# Altium PCB beta2.0.PcbDoc
Units mil, origin at the board's own origin, x right, y up, seen from the top; angles counter-clockwise.
Board outline 3150 x 3940 mil, 2 copper layers (Top Layer, Bottom Layer); 210 components, 112 nets, 560 pads, 14 vias.
Unrouted connection lines stored in the file: 395.
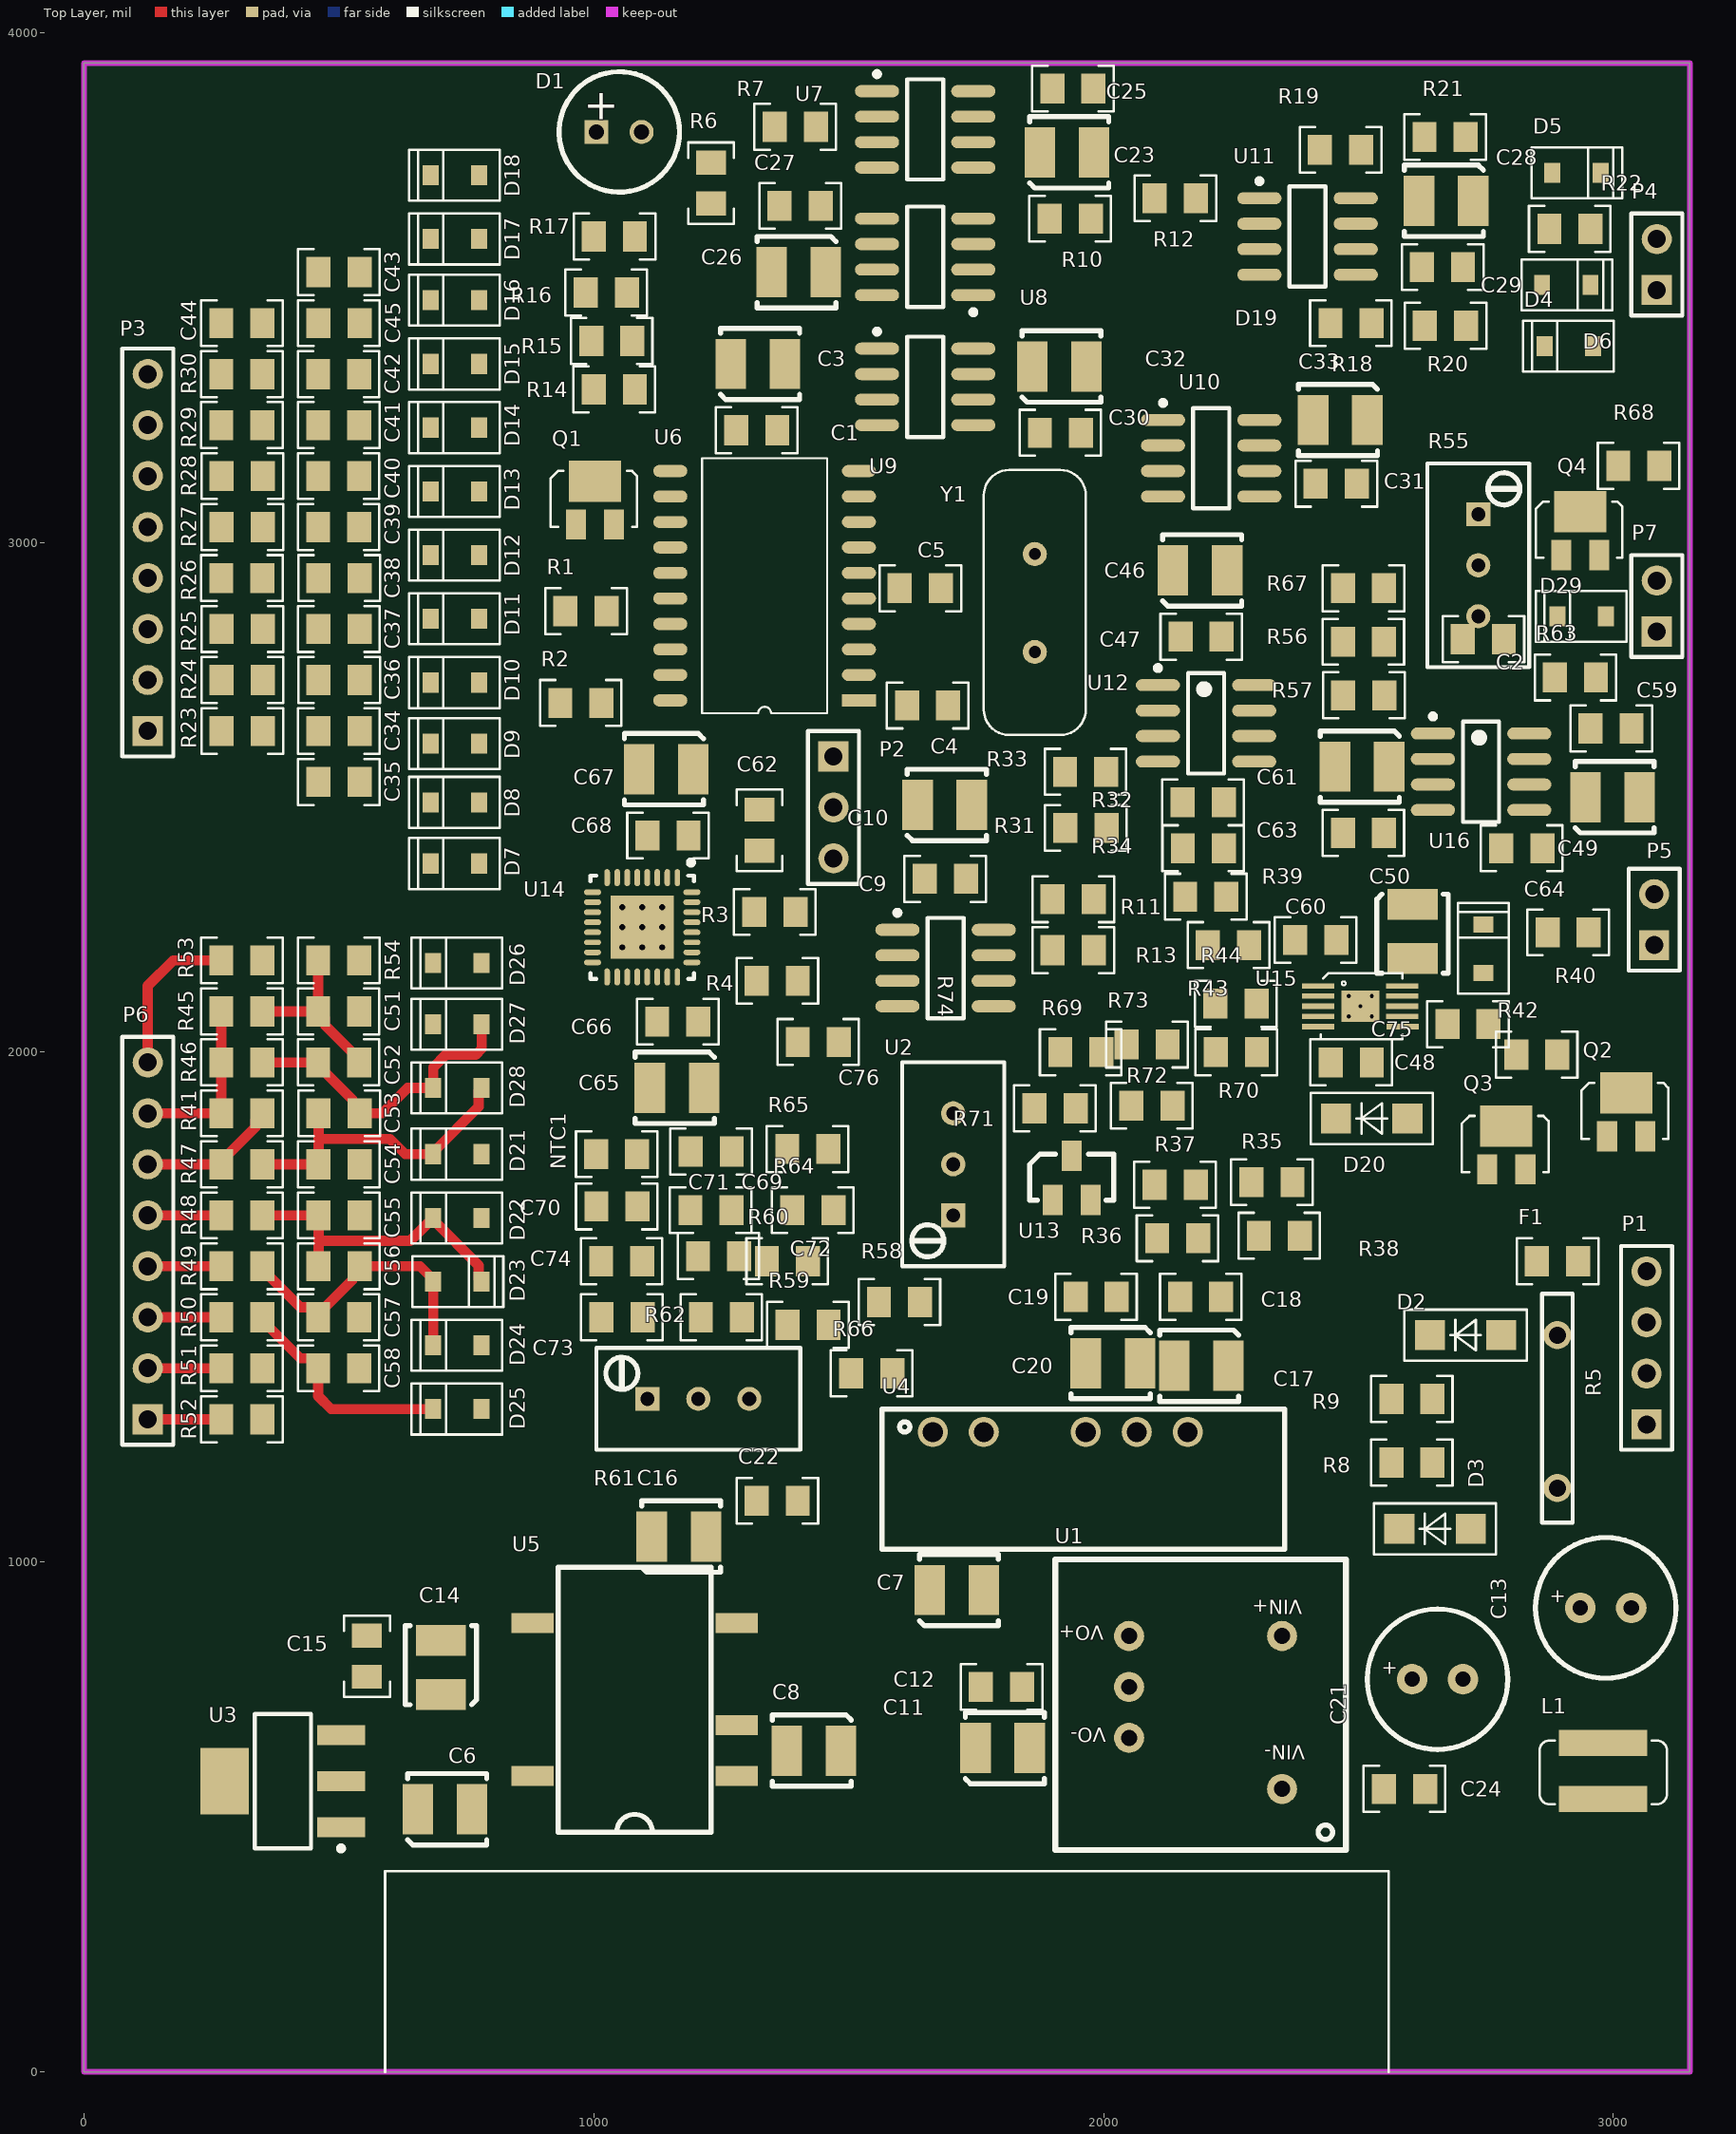
[diagram p0: Top Layer view]
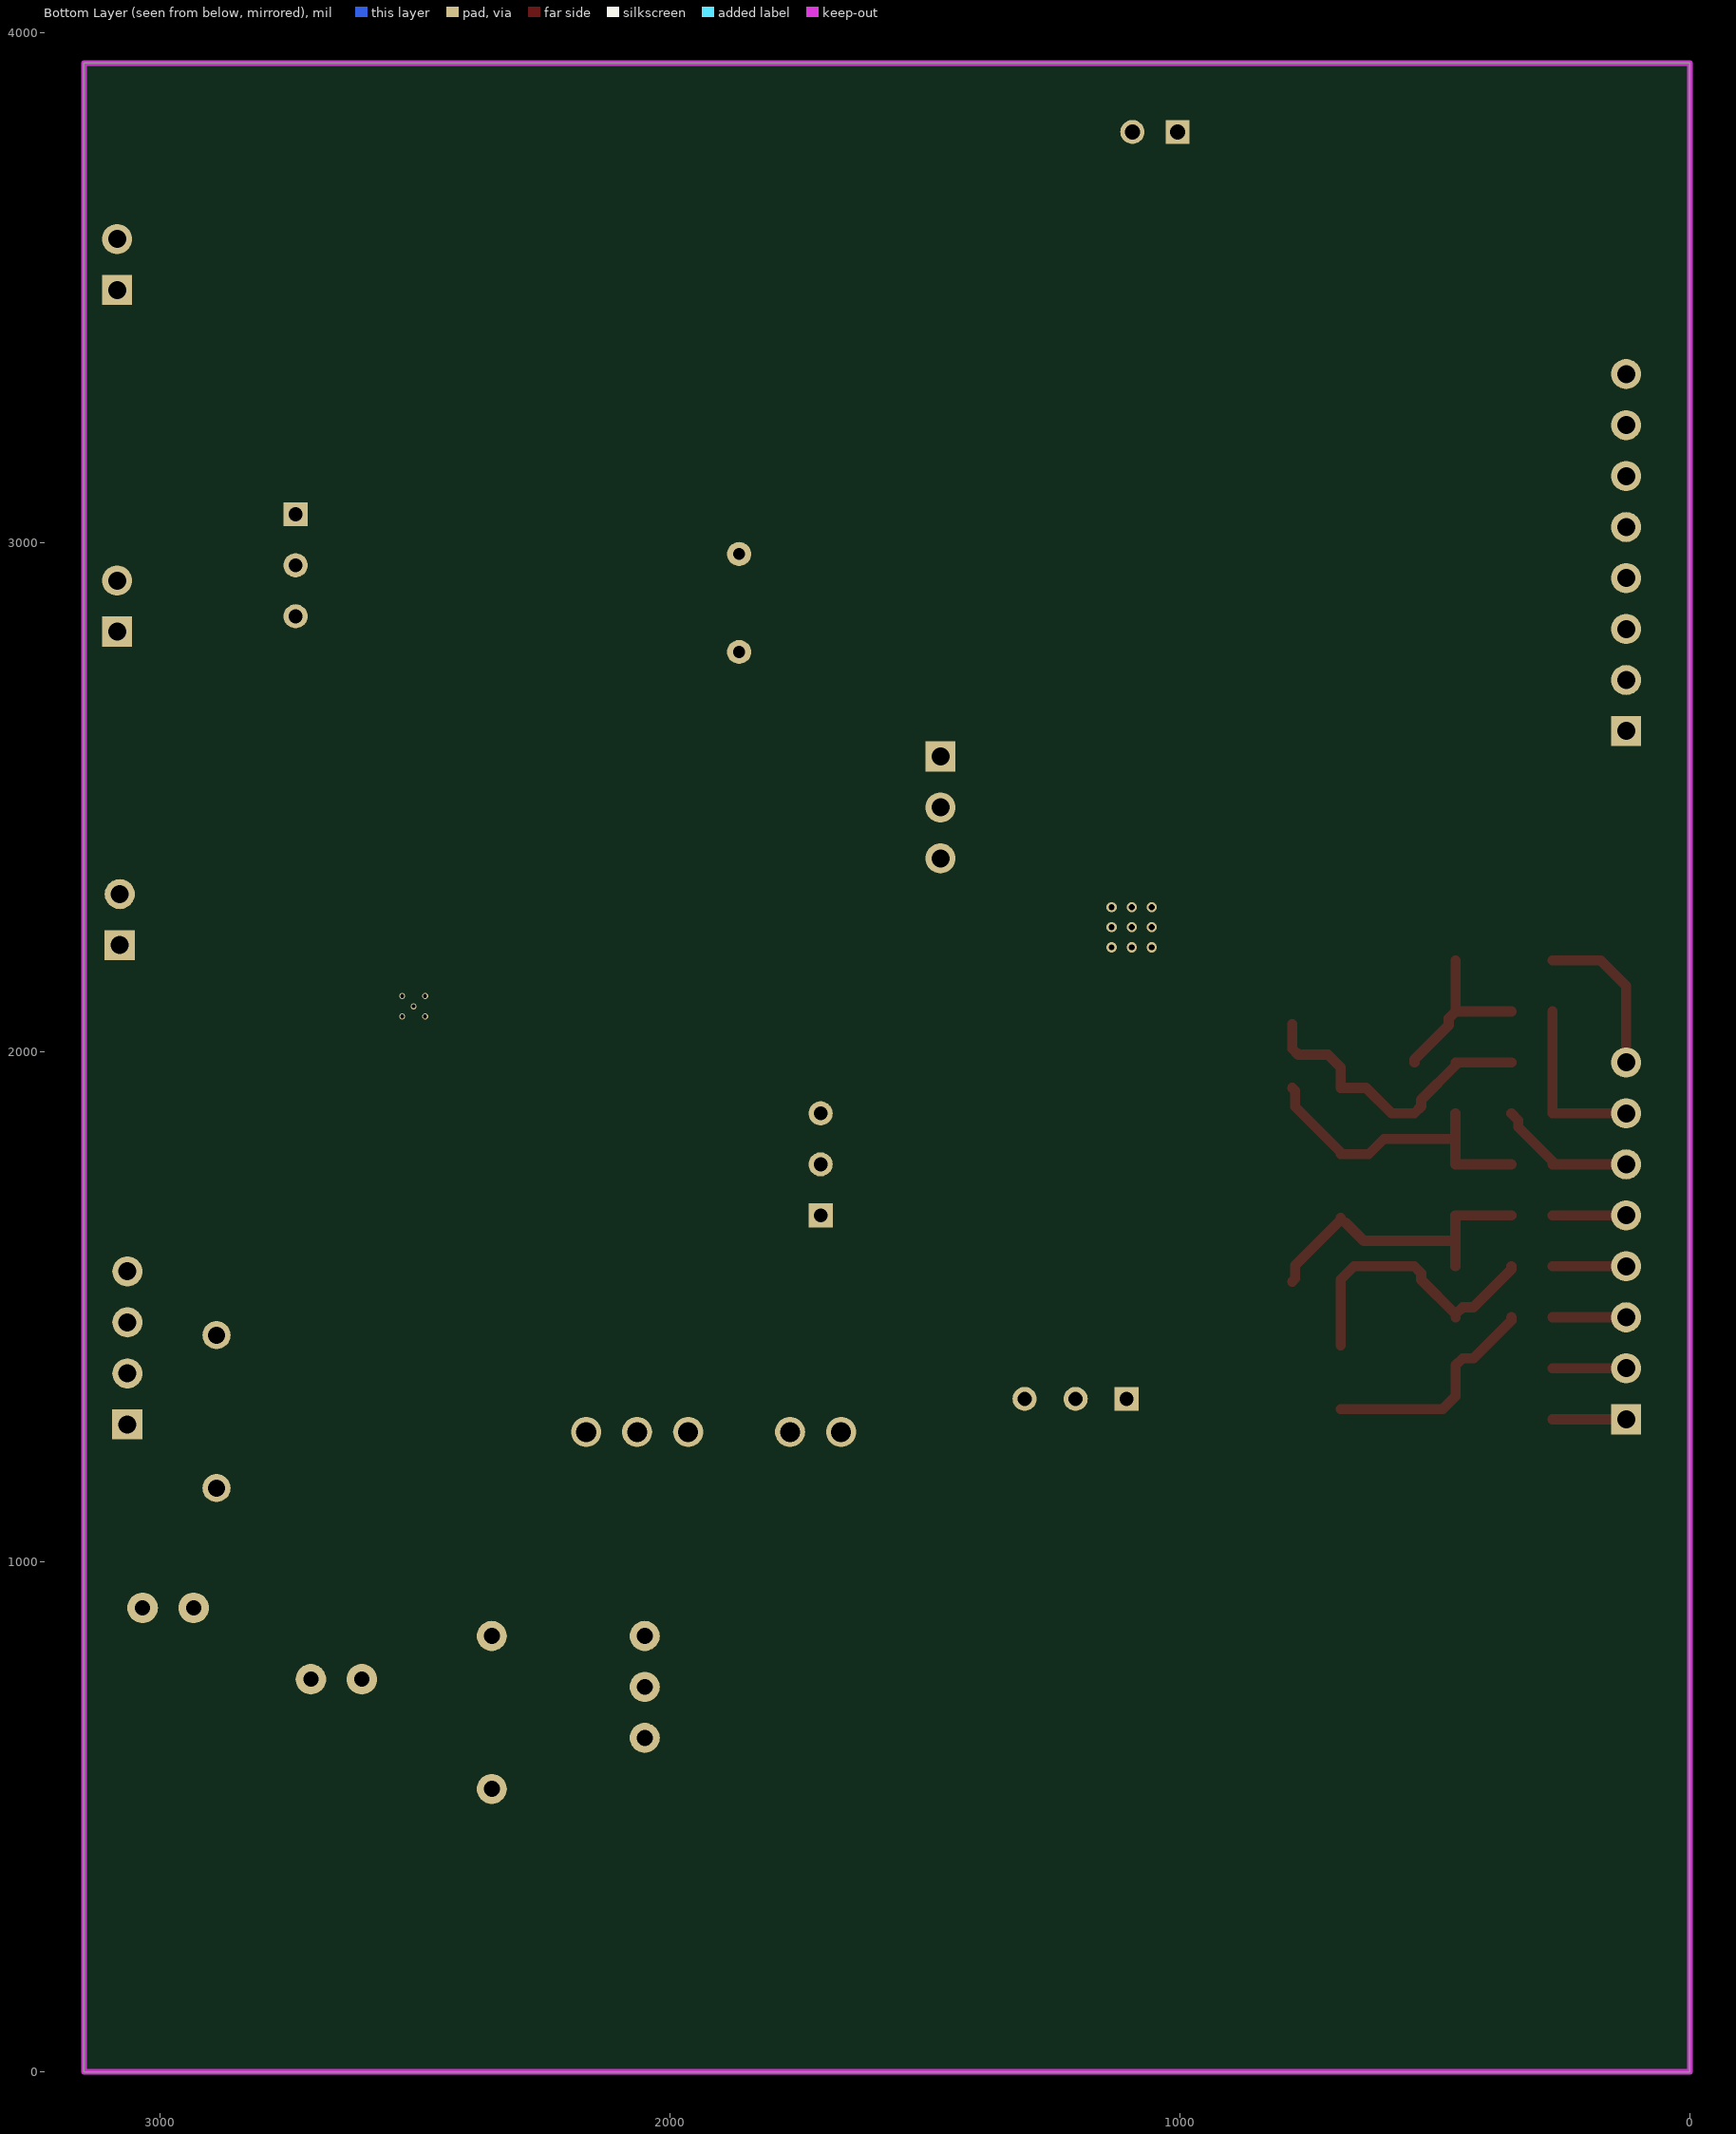
[diagram p1: Bottom Layer view, seen from below]

## Layer stack, top to bottom
Top Solder: solder mask 0.4, Solder Resist, Dk 3.5
Top Layer: signal copper 1.4
Dielectric 1: dielectric 12.6, FR-4, Dk 4.8
Bottom Layer: signal copper 1.4
Bottom Solder: solder mask 0.4, Solder Resist, Dk 3.5

## Board outline
0,0 0,3940 3150,3940 3150,0

## Design rules (kind name [scope] priority, off if disabled: settings)
Clearance [All] p1: gap=10 ignorepadtopadclearanceinfootprint=FALSE except(0: Arc-Hole Track-Hole SMDPad-Hole THPad-Hole Via-Hole Fill-Hole Poly-Hole Region-Hole Text-Hole)
PolygonConnect [All] p1: connectstyle=Relief reliefconductorwidth=10 reliefentries=4 polygonreliefangle="90 Angle" airgapwidth=10
RoutingVias [All] p1: holewidth=28 width=50 viastyle="Through Hole" minholewidth=28 minwidth=50 maxholewidth=28 maxwidth=50
SolderMaskExpansion [All] p1: expansion=4 istentingtop=FALSE
Width [All] p1: maxlimit=40 minlimit=8 preferedwidth=20 minimp=50.000000 maximp=50.000000 favimp=50.000000
30 further rules are at their usual default settings.

## Components (designator, comment, footprint, x,y, rotation, side; value= is the part's Value field where it differs from the comment)
C1 "CC0805MRX7R9BB104" 0805C 1279.37,3220 r0 top value=0.1uF
C2 "CC0805MRX7R9BB330" 0805C 2785,2810 r180 top value=33pF
C3 "T494B106M006AHAUTO" CB 1268.7,3350 r90 top value=10uF
C4 "CC0805MRX7R9BB106" 0805C 1695,2680 r180 top value=10uF
C5 "CC0805MRX7R9BB330" 0805C 1680.63,2910 r180 top value=33pF
C6 "T494B106M006AHAUTO" CB 655,515 r90 top value=10uF
C7 "T494B106M006AHAUTO" CB 1658.7,945 r90 top value=10uF
C8 "T494B106M006AHAUTO" CB 1485,630 r270 top value=10uF
C9 "CC0805MRX7R9BB104" 0805C 1649.37,2340 r0 top value=0.1uF
C10 "T494B106M006AHAUTO" CB 1635,2485 r90 top value=10uF
C11 "T494B107M006AHAUTO" CB 1748.7,635 r90 top value=100uF
C12 "CC0805MRX7R9BB104" 0805C 1840,755 r180 top value=0.1uF
C13 "ECR1HQG100M-063007" Φ6.3×11.5 2935,910 r0 top value=10uF
C14 "T494B476M010AHAUTO" CB 700,740 r180 top value=47uF
C15 "CC0805MRX7R9BB104" 0805C 555,775 r90 top value=0.1uF
C16 "T494B106M006AHAUTO" CB 1113.7,1050 r90 top value=10uF
C17 "T494B476K025ATAUTO" CB 2245,1385 r270 top value=47uF
C18 "CC0805MRX7R9BB104" 0805C 2230.63,1520 r180 top value=0.1uF
C19 "CC0805MRX7R9BB104" 0805C 1945,1520 r0 top value=0.1uF
C20 "T494B476K025ATAUTO" CB 2071.3,1390 r270 top value=47uF
C21 "ECR1HQG100M-063007" Φ6.3×11.5 2605,770 r0 top value=10uF
C22 "CC0805MRX7R9BB104" 0805C 1400,1120 r180 top value=0.1uF
C23 "T494B106M006AHAUTO" CB 1875,3765 r90 top value=10uF
C24 "CC0805MRX7R9BB104" 0805C 2550,555 r0 top value=0.1uF
C25 "CC0805MRX7R9BB104" 0805C 1980,3890 r180 top value=0.1uF
C26 "T494B106M006AHAUTO" CB 1455,3530 r270 top value=10uF
C27 "CC0805MRX7R9BB104" 0805C 1445,3660 r180 top value=0.1uF
C28 "T494B106M006AHAUTO" CB 2725,3670 r270 top value=10uF
C29 "CC0805MRX7R9BB104" 0805C 2705,3540 r180 top value=0.1uF
C30 "CC0805MRX7R9BB104" 0805C 1875,3215 r0 top value=0.1uF
C31 "CC0805MRX7R9BB104" 0805C 2496.57,3115 r180 top value=0.1uF
C32 "T494B106M006AHAUTO" CB 1860,3345 r90 top value=10uF
C33 "T494B106M006AHAUTO" CB 2517.24,3240 r270 top value=10uF
C34 "CC0805MRX7R9BB103" 0805C 460,2630 r0 top value=0.01uF
C35 "CC0805MRX7R9BB104" 0805C 460,2530 r0 top value=0.1uF
C36 "CC0805MRX7R9BB103" 0805C 540.63,2730 r180 top value=0.01uF
C37 "CC0805MRX7R9BB103" 0805C 460,2830 r0 top value=0.01uF
C38 "CC0805MRX7R9BB104" 0805C 540.63,2930 r180 top value=0.1uF
C39 "CC0805MRX7R9BB103" 0805C 459.37,3030 r0 top value=0.01uF
C40 "CC0805MRX7R9BB103" 0805C 459.37,3130 r0 top value=0.01uF
C41 "CC0805MRX7R9BB104" 0805C 540,3230 r180 top value=0.1uF
C42 "CC0805MRX7R9BB103" 0805C 459.37,3330 r0 top value=0.01uF
C43 "CC0805MRX7R9BB103" 0805C 460,3530 r0 top value=0.01uF
C44 "CC0805MRX7R9BB104" 0805C 350,3430 r180 top value=0.1uF
C45 "CC0805MRX7R9BB103" 0805C 460,3430 r0 top value=0.01uF
C46 "T494B106M006AHAUTO" CB 2135.94,2945 r90 top value=10uF
C47 "CC0805MRX7R9BB104" 0805C 2231.57,2815 r180 top value=0.1uF
C48 "CC0805MRX7R9BB103" 0805C 2445.32,1980 r0 top value=0.01uF
C49 "T494B106M025AHAUTO" CB 2945,2500 r90 top value=10uF
C50 "T494B106M025AHAUTO" CB 2605.94,2290 r0 top value=10uF
C51 "CC0805MRX7R9BB103" 0805C 459.37,2080 r0 top value=0.01uF
C52 "CC0805MRX7R9BB104" 0805C 459.37,1980 r0 top value=0.1uF
C53 "CC0805MRX7R9BB104" 0805C 540.63,1880 r180 top value=0.1uF
C54 "CC0805MRX7R9BB103" 0805C 460,1780 r0 top value=0.01uF
C55 "CC0805MRX7R9BB103" 0805C 460,1680 r0 top value=0.01uF
C56 "CC0805MRX7R9BB104" 0805C 460,1580 r0 top value=0.1uF
C57 "CC0805MRX7R9BB103" 0805C 459.37,1480 r0 top value=0.01uF
C58 "CC0805MRX7R9BB103" 0805C 459.37,1380 r0 top value=0.01uF
C59 "CC0805MRX7R9BB104" 0805C 3035.63,2635 r180 top value=0.1uF
C60 "CC0805MRX7R9BB104" 0805C 2375.94,2220 r0 top value=0.1uF
C61 "T494B106M025AHAUTO" CB 2560,2560 r270 top value=10uF
C62 "CC0805MRX7R9BB104" 0805C 1325,2395 r90 top value=0.1uF
C63 "CC0805MRX7R9BB104" 0805C 2469.37,2430 r0 top value=0.1uF
C64 "CC0805MRX7R9BB104" 0805C 2780,2400 r0 top value=0.1uF
C65 "T494B106M006AHAUTO" CB 1216.3,1930 r270 top value=10uF
C66 "CC0805MRX7R9BB104" 0805C 1205,2060 r180 top value=0.1uF
C67 "T494B106M006AHAUTO" CB 1195,2555 r270 top value=10uF
C68 "CC0805MRX7R9BB104" 0805C 1185.63,2425 r180 top value=0.1uF
C69 "CC0805MRX7R9BB103" 0805C 1189.37,1690 r0 top value=0.01uF
C70 "CC0805MRX7R9BB104" 0805C 1005,1697.36 r0 top value=0.1uF
C71 "CC0805MRX7R9BB103" 0805C 1190,1805 r0 top value=0.01uF
C72 "CC0805MRX7R9BB103" 0805C 1204.37,1600 r0 top value=0.01uF
C73 "CC0805MRX7R9BB104" 0805C 1015,1480 r0 top value=0.1uF
C74 "CC0805MRX7R9BB103" 0805C 1014.37,1590 r0 top value=0.01uF
C75 "CC0805MRX7R9BB104" 0805C 2674.37,2055 r0 top value=0.1uF
C76 "CC0805MRX7R9BB104" 0805C 1400,2020 r0 top value=0.1uF
D1 "150080GS75000" LEDΦ3.0 1005,3805 r0 top
D2 "1N5819HW" SOD123 2780,1445 r180 top
D3 "1N5819HW" SOD123 2720,1065 r180 top
D4 "SD12CT1" SOD323 2960,3385 r180 top
D5 "SD12CT1" SOD323 2880,3725 r0 top
D6 "SD12CT1" SOD323 2860,3505 r0 top
D7 "SD03C" SOD323 775,2370 r180 top
D8 "SD03C" SOD323 775,2490 r180 top
D9 "SD03C" SOD323 775,2605 r180 top
D10 "SD03C" SOD323 775,2725 r180 top
D11 "SD03C" SOD323 775,2850 r180 top
D12 "SD03C" SOD323 775,2975 r180 top
D13 "SD03C" SOD323 775,3100 r180 top
D14 "SD03C" SOD323 775,3225 r180 top
D15 "SD03C" SOD323 775,3350 r180 top
D16 "SD03C" SOD323 775,3475 r180 top
D17 "SD03C" SOD323 775,3595 r180 top
D18 "SD03C" SOD323 775,3720 r180 top
D19 "SD15CT1" SOD323 2745,2155 r90 top
D20 "RB160MM-50TF" SOD123 2595.94,1870 r180 top
D21 "SD03C" SOD323 780,1800 r180 top
D22 "SD03C" SOD323 780,1675 r180 top
D23 "SD03C" SOD323 685,1550 r0 top
D24 "SD03C" SOD323 780,1425 r180 top
D25 "SD03C" SOD323 780,1300 r180 top
D26 "SD03C" SOD323 780,2175 r180 top
D27 "SD03C" SOD323 780,2055 r180 top
D28 "SD03C" SOD323 780,1930 r180 top
D29 "SD15CT1" SOD323 2985,2855 r180 top
F1 "Fuse 1" 0805R 2930.63,1590 r180 top
L1 "VLS4012HBX-150M" VLS4012 2980,645 r0 top value=15uH
NTC1 "NTCS0805E3103JHT" 0805R 1085,1800 r180 top
P1 "Header 4" HDR1X4 3065,1270 r90 top
P2 "Header 3" HDR1X3 1470,2580 r270 top
P3 "Header 8" HDR1X8 125,2630 r90 top
P4 "Header 2" HDR1X2 3085,3495 r90 top
P5 "Header 2" HDR1X2 3080,2210 r90 top
P6 "Header 8" HDR1X8 125,1280 r90 top
P7 "Header 2" HDR1X2 3085,2825 r90 top
Q1 "MMSS8050" SOT-23-BJT 965,3035 r0 top
Q2 "SS8550" SOT-23-BJT 2987.6,1835 r0 top
Q3 "SI2309" SOT-23-MOS 2752.6,1770 r0 top
Q4 "MMSS8050" SOT-23-BJT 2897.6,2975 r0 top
R1 "RC0805JR-07120RL" 0805R 1025,2865 r180 top value=120
R2 "RC0805JR-0710KL" 0805R 934.37,2685 r0 top value=10K
R3 "RC0805JR-07470RL" 0805R 1315,2275 r0 top value=470
R4 "RC0805JR-073300RL" 0805R 1400,2140 r180 top value=3.3K
R5 "10D470K" mov 2890,1295 r90 top
R6 "RC0805JR-0710KRL" 0805R 1230,3664.37 r90 top value=10K
R7 "RC0805JR-07470RL" 0805R 1355,3815 r0 top value=470
R8 "PNP-200KJBJ26-10R" 0805R 2564.37,1195 r0 top value=10
R9 "PNP-200KJBJ26-10R" 0805R 2564.37,1320 r0 top value=10
R10 "RC0805JR-0710KRL" 0805R 1894.37,3635 r0 top value=10K
R11 "RC0805JR-071KL" 0805R 1980.63,2300 r180 top value=1K
R12 "RC0805JR-07470RL" 0805R 2180.63,3675 r180 top value=470
R13 "RC0805JR-071KL" 0805R 1980.63,2200 r180 top value=1K
R14 "RC0805JR-07470RL" 0805R 1000,3300 r0 top value=470
R15 "RC0805JR-07470RL" 0805R 995,3395 r0 top value=470
R16 "RC0805JR-07470RL" 0805R 984.37,3490 r0 top value=470
R17 "RC0805JR-07470RL" 0805R 1080.63,3600 r180 top value=470
R18 "RC0805JR-0720RL" 0805R 2445,3430 r0 top value=20
R19 "RC0805JR-0720RL" 0805R 2505,3770 r180 top value=20
R20 "RC0805JR-0710KL" 0805R 2710.63,3425 r180 top value=10K
R21 "RC0805JR-0710KL" 0805R 2710,3795 r180 top value=10K
R22 "RC0805JR-07120RL" 0805R 2874.37,3615 r0 top value=120
R23 "RC0805JR-071KL" 0805R 350.63,2630 r180 top value=1K
R24 "RC0805JR-071KL" 0805R 350.63,2730 r180 top value=1K
R25 "RC0805JR-071KL" 0805R 350.63,2830 r180 top value=1K
R26 "RC0805JR-071KL" 0805R 350,2930 r180 top value=1K
R27 "RC0805JR-071KL" 0805R 350.63,3030 r180 top value=1K
R28 "RC0805JR-071KL" 0805R 350.63,3130 r180 top value=1K
R29 "RC0805JR-071KL" 0805R 350,3230 r180 top value=1K
R30 "RC0805JR-071KL" 0805R 350,3330 r180 top value=1K
R31 "RC0805JR-071KL" 0805R 1925,2440 r0 top value=1K
R32 "RC0805JR-071KL" 0805R 2155,2490 r0 top value=1K
R33 "RC0805JR-071KL" 0805R 1924.37,2550 r0 top value=1K
R34 "RC0805JR-071KL" 0805R 2155.32,2400 r0 top value=1K
R35 "RC0805JR-073KL" 0805R 2290,1745 r0 top value=3K
R36 "RC0805JR-0710KL" 0805R 2105,1635 r0 top value=10K
R37 "RC0805JR-073KL" 0805R 2100,1740 r0 top value=3K
R38 "RC0805JR-0710KL" 0805R 2304.37,1640 r0 top value=10K
R39 "RC0805JR-000KL" 0805R 2240.63,2305 r180 top value=0R
R40 "RC0805JR-0715RL" 0805R 2870.94,2235 r0 top value=15
R41 "RC0805JR-075600RL" 0805R 350,1880 r180 top value=5.6K
R42 "RC0805JR-0715RL" 0805R 2809.37,1995 r0 top value=15
R43 "RC0805JR-075600RL" 0805R 2219.37,2095 r0 top value=5.6K
R44 "RC0805JR-078200RL" 0805R 2285,2210 r180 top value=8.2K
R45 "RC0805JR-071KL" 0805R 350,2080 r180 top value=1K
R46 "RC0805JR-071KL" 0805R 350,1980 r180 top value=1K
R47 "RC0805JR-071KL" 0805R 350,1780 r180 top value=1K
R48 "RC0805JR-071KL" 0805R 350,1680 r180 top value=1K
R49 "RC0805JR-071KL" 0805R 350,1580 r180 top value=1K
R50 "RC0805JR-071KL" 0805R 350,1480 r180 top value=1K
R51 "RC0805JR-07470RL" 0805R 350,1380 r180 top value=470
R52 "RC0805JR-07470RL" 0805R 350,1280 r180 top value=470
R53 "RC0805JR-07470RL" 0805R 350,2180 r180 top value=470
R54 "RC0805JR-07100RL" 0805R 540,2180 r180 top value=100R
R55 "3296W-1-104" POTENTIOMETER-3296W 2735,2955 r270 top value=100K
R56 "RC0805JR-07100ML" 0805R 2469.37,2805 r0 top value=100M
R57 "RC0805JR-072KL" 0805R 2550.63,2700 r180 top value=2K
R58 "RC0805JR-075600RL" 0805R 1559.37,1510 r0 top value=5.6K
R59 "RC0805JR-071000KL" 0805R 1380,1465 r0 top value=1M
R60 "RC0805JR-0768KL" 0805R 1339.37,1590 r0 top value=68K
R61 "3296W-1-102" POTENTIOMETER-3296W 1205,1320 r0 top value=1K
R62 "RC0805JR-0768KL" 0805R 1210,1480 r0 top value=68K
R63 "RC0805JR-072KL" 0805R 2965.63,2735 r180 top value=2K
R64 "RC0805JR-071KL" 0805R 1389.37,1690 r0 top value=1K
R65 "RC0805JR-071KL" 0805R 1379.37,1810 r0 top value=1K
R66 "RC0805JR-071KL" 0805R 1505,1370 r0 top value=1K
R67 "RC0805JR-0710KL" 0805R 2550,2910 r180 top value=10K
R68 "RC0805JR-07470RL" 0805R 3009.37,3150 r0 top value=470
R69 "RC0805JR-072KL" 0805R 1915,2000 r0 top value=2K
R70 "RC0805JR-072KL" 0805R 2220,2000 r0 top value=2K
R71 "RC0805JR-073300RL" 0805R 1864.37,1890 r0 top value=3.3K
R72 "RC0805JR-074700RL" 0805R 2054.37,1895 r0 top value=4.7K
R73 "RC0805JR-07100ML" 0805R 2045,2015 r0 top value=100M
R74 "3296W-1-104" POTENTIOMETER-3296W 1705,1780 r90 top value=100K
U1 "WRB_ST(SD)-3WR2" WRB_ST(SD)-3WR2 2350,555 r180 top
U2 "VO2630" SO8_N 1690,2165 r0 top
U3 "LM1117IMP-3.3/NOPB" SOT223_N 390,570 r180 top
U4 "A05_S-1WR3" A05_S-1WR3 1665,1255 r0 top
U5 "F0505XT-W2R3" F0505XT-W2R3 1280,580 r90 top
U6 "STC12C5620AD" SOP20 1520.08,2690 r180 top
U7 "6N137" SO8_N 1650,3810 r0 top
U8 "6N137" SO8_N 1650,3560 r180 top
U9 "VO2630" SO8_N 1650,3305 r0 top
U10 "VO2630" SO8_N 2210.94,3165 r0 top
U11 "SN65LBC184" SO8_N 2400,3600 r0 top
U12 "DAC7611U" TI-D8_N 2200.94,2645 r0 top
U13 "TL431" SOT-23-3 1900,1710 r0 top
U14 "AD7124-8" TI-RHB32-3150X3150TP_V 1095,2245 r270 top
U15 "XTR111" S-PDSO-G10 2420.94,2130 r0 top
U16 "TL062ACD" TI-D8_N 2740.43,2550 r0 top
Y1 "XTAL" 11.0592MHZ 1865,2977.13 r270 top

## Footprints (in the part's own frame and the unit in brackets; to place one, negate y for a bottom-side part, rotate by r counter-clockwise, add the part's x,y. Pads: shape width x height; smd on the part's side, far side on the other; paste and mask are expansions set on the pad)
11.0592MHZ [mm]
  round 1.2 hole 0.6: 1(0,0) 2(4.88,0)
  silkscreen extent -4.19,-2.54 9.02,2.54, body extent -3.99,-2.29 8.81,2.54, height 4.3
0805C [mm]
  rect 1.2x1.5 smd: 1(0,0) 2(2.048,0)
  silkscreen extent -1.02,-1.14 3.05,1.14, body extent 0.02,-0.65 2.02,0.66, height 0.73
0805R [mm]
  rect 1.2x1.5 smd: 1(0,0) 2(2.048,0)
  silkscreen extent -1.02,-1.14 3.05,1.14, body extent -0.13,-0.67 2.17,0.68, height 0.76
A05_S-1WR3 [mm]
  round 1.5 hole 1: 1(0,0) 2(2.54,0) 4(7.62,0) 5(10.16,0) 6(12.7,0)
  silkscreen extent -2.54,-5.84 17.53,1.14, body extent -2.33,-5.29 17.32,0.71, height 10.16
CB [mm] "Tantalum?Capacitor"
  rect 2.5x1.524 smd: 1(0,0) 2(0,-2.7)
  silkscreen extent -1.78,-3.43 1.78,0.51, body extent -1.48,-3.37 1.52,0.33, height 4.11
F0505XT-W2R3 [mm]
  rect 1x2.1 smd: 1(0,0) 2(2.54,0) 4(7.62,0) 5(7.62,10.16) 8(0,10.16)
  silkscreen extent -2.79,1.27 10.41,8.89, body extent -2.79,-0.61 10.41,10.79, height 5
HDR1X2 [mm] "Connector; Header; 2 Position"
  rect 1.5x1.5 hole 0.9: 1(0,0)
  round 1.5 hole 0.9: 2(2.54,0)
  silkscreen extent -1.27,-1.27 3.81,1.27
HDR1X3 [mm] "Connector; Header; 3 Position"
  rect 1.5x1.5 hole 0.9: 1(0,0)
  round 1.5 hole 0.9: 2(2.54,0) 3(5.08,0)
  silkscreen extent -1.27,-1.27 6.35,1.27
HDR1X4 [mm] "Connector; Header; 4 Position"
  rect 1.5x1.5 hole 0.9: 1(0,0)
  round 1.5 hole 0.9: 2(2.54,0) 3(5.08,0) 4(7.62,0)
  silkscreen extent -1.27,-1.27 8.89,1.27
HDR1X8 [mm] "Connector; Header; 8 Position"
  rect 1.5x1.5 hole 0.9: 1(0,0)
  round 1.5 hole 0.9: 2(2.54,0) 3(5.08,0) 4(7.62,0) 5(10.16,0) 6(12.7,0) 7(15.24,0) 8(17.78,0)
  silkscreen extent -1.27,-1.27 19.05,1.27
LEDΦ3.0 [mm]
  rect 1.2x1.2 hole 0.762: 1(0,0)
  round 1.2 hole 0.762: 2(2.25,0)
  silkscreen extent -1.85,-3 4.14,3, body extent -0.64,-1.9 2.79,1.9, height 4.64
mov [mm] "Axial Device, Thru-Hole; 2 Leads; 0.3 in Pin Spacing"
  round 1.4 hole 0.85: 1(-3.81,0) 2(3.81,0)
  silkscreen extent -5.53,-0.76 5.88,0.76, body extent -5.5,-0.9 5.8,0.95, height 18.5
POTENTIOMETER-3296W [mm] "Thru-Hole; 3 Leads"
  rect 1.2x1.2 hole 0.7: 1(-2.54,0)
  round 1.2 hole 0.7: 2(0,0) 3(2.54,0)
  silkscreen extent -5.08,-2.54 5.08,2.54, body extent -4.78,-2.41 4.78,2.41, height 6.3
S-PDSO-G10 [mm]
  rect 1.6x0.27 smd: 1(0,0) 2(0,-0.508) 3(0,-1.016) 4(0,-1.524) 5(0,-2.032) 6(4.2,-2.032) 7(4.191,-1.524) 8(4.191,-1.016) 9(4.191,-0.508) 10(4.191,0)
  rect 1.88x1.57 smd: 12(2.1,-1.016)
  silkscreen extent 0.13,-2.67 4.19,0.64
SO8_N [mm] "SOIC, 8-Leads, Body 4.9x3.9mm, Pitch 1.27mm, IPC Medium Density"
  oval 2.2x0.6 smd: 1(-2.4,1.905) 2(-2.4,0.635) 3(-2.4,-0.635) 4(-2.4,-1.905) 5(2.4,-1.905) 6(2.4,-0.635) 7(2.4,0.635) 8(2.4,1.905)
  silkscreen extent -2.52,-2.5 0.9,2.88, body extent -2,-2.5 2,2.5, height 1.75
SOD123 [mm]
  rect 1.5x1.5 smd: 1(0,0) 2(3.556,0)
  silkscreen extent -1.27,-1.27 4.83,1.27, body extent -0.2,-0.8 3.5,0.8, height 1.27
SOD323 [mm]
  rect 0.8x1 smd: 1(0,0) 2(2.413,0)
  silkscreen extent -1.03,-1.27 3.49,1.27, body extent -0.16,-0.68 2.44,0.67, height 1.1
SOP20 [mm]
  rect 1.7x0.6 smd: 1(0,0)
  oval 1.7x0.6 smd: 2(0,-1.27) 3(0,-2.54) 4(0,-3.81) 5(0,-5.08) 6(0,-6.35) 7(0,-7.62) 8(0,-8.89) 9(0,-10.16) 10(0,-11.43) 11(9.4,-11.43) 12(9.4,-10.16) 13(9.4,-8.89) 14(9.4,-7.62) 15(9.4,-6.35) 16(9.4,-5.08) 17(9.4,-3.81) 18(9.4,-2.54) 19(9.4,-1.27) 20(9.4,0)
  silkscreen extent 1.58,-12.06 7.82,0.64, body extent -0.45,-12.07 9.85,0.63, height 2.51
SOT223_N [mm] "SOT223, 4-Leads, Body 6.5x3.5mm, Pitch 2.3mm, Lead Span 7mm, IPC Medium Density"
  rect 2.4x1 smd: 1(-2.9,2.3) 2(-2.9,0) 3(-2.9,-2.3)
  rect 2.4x3.3 smd: 4(2.9,0)
  silkscreen extent -3.03,-3.35 1.4,3.47, body extent -1.85,-3.35 1.85,3.35, height 1.7
SOT-23-3 [mm]
  rect 1x1.524 smd: 1(0,0) 2(1.9,0) 3(0.95,2.2)
  silkscreen extent -1.14,0 3.05,2.29, body extent -0.55,-0.23 2.45,2.27, height 0.55
SOT-23-BJT [mm]
  rect 2.6x2.05 smd: 1(0.95,2.159)
  rect 1x1.5 smd: 2(0,0) 3(1.9,0)
  silkscreen extent -1.27,-0.13 3.05,2.67, body extent -0.55,-0.23 2.45,2.27, height 0.55
SOT-23-MOS [mm]
  rect 1x1.5 smd: 1(0,0) 3(1.9,0)
  rect 2.6x2.05 smd: 2(0.95,2.159)
  silkscreen extent -1.27,-0.13 3.05,2.67, body extent -0.55,-0.11 2.45,2.39, height 0.55
TI-D8_N [mm] "SOIC, 8-Leads, Body 4.9x3.9mm, Pitch 1.27mm, IPC Medium Density"
  oval 2.2x0.6 smd: 1(-2.4,1.905) 2(-2.4,0.635) 3(-2.4,-0.635) 4(-2.4,-1.905) 5(2.4,-1.905) 6(2.4,-0.635) 7(2.4,0.635) 8(2.4,1.905)
  silkscreen extent -2.52,-2.5 0.9,2.88, body extent -2,-2.5 2,2.5, height 1.75
TI-RHB32-3150X3150TP_V [mm] "QFN, 32-Leads, Body 5x5mm, Pitch 0.5mm, Thermal Pad 3.15x3.15mm"
  oval 0.85x0.28 smd: 1(-2.475,1.75) 2(-2.475,1.25) 3(-2.475,0.75) 4(-2.475,0.25) 5(-2.475,-0.25) 6(-2.475,-0.75) 7(-2.475,-1.25) 8(-2.475,-1.75) 17(2.475,-1.75) 18(2.475,-1.25) 19(2.475,-0.75) 20(2.475,-0.25) 21(2.475,0.25) 22(2.475,0.75) 23(2.475,1.25) 24(2.475,1.75)
  oval 0.28x0.85 smd: 9(-1.75,-2.475) 10(-1.25,-2.475) 11(-0.75,-2.475) 12(-0.25,-2.475) 13(0.25,-2.475) 14(0.75,-2.475) 15(1.25,-2.475) 16(1.75,-2.475) 25(1.75,2.475) 26(1.25,2.475) 27(0.75,2.475) 28(0.25,2.475) 29(-0.25,2.475) 30(-0.75,2.475) 31(-1.25,2.475) 32(-1.75,2.475)
  rect 3.15x3.15 smd: 33(0,0)
  silkscreen extent -3.35,-2.58 2.58,2.57, body extent -2.5,-2.5 2.5,2.5, height 1
VLS4012 [mm]
  rect 4.4x1.3 smd: 1(0,0) 2(0,-2.8)
  silkscreen extent -3.17,-3.05 3.17,0.13, body extent -2.03,-3.62 2.03,0.83, height 1.7
WRB_ST(SD)-3WR2 [mm] "WRB_ST(SD)-3WR2"
  round 1.5 hole 0.8: 1(0,0) 4(0,-7.62) 5(7.62,-7.62) 6(7.62,-5.08) 7(7.62,-2.54)
  silkscreen extent -3.18,-11.43 11.3,3.05, body extent -2.94,-11.19 11.06,2.81, height 9
Φ6.3×11.5 [mil]
  round 60 hole 30: 1(0,0) 2(100,0)
  silkscreen extent -88,-138 188,138, body extent -75,-125 175,125, height 454

## Part data
C1 C2 C4 C5 C9 C12 C15 C18 C19 C22 C24 C25 C27 C29 C30 C31 C34 C35 C36 C37 C38 C39 C40 C41 C42 C43 C44 C45 C47 C48 C51 C52 C53 C54 C55 C56 C57 C58 C59 C60 C62 C63 C64 C66 C68 C69 C70 C71 C72 C73 C74 C75 C76: library part Cap, "Capacitor"
  C2 C5 C9 C12 C15 C18 C19 C22 C24 C25 C27 C29 C30 C31 C34 C35 C36 C37 C38 C39 C40 C41 C42 C43 C44 C45 C47 C48 C51 C52 C53 C54 C55 C56 C57 C58 C59 C60 C62 C63 C64 C66 C68 C69 C70 C71 C72 C73 C74 C75 C76: LatestRevisionDate=17-Jul-2002, LatestRevisionNote="Re-released for DXP Platform.", PackageDescription="Radial Cap, Thru-Hole; 2 Leads; 0.3 in Pin Spacing", PackageReference=RAD-0.3, Published=8-Jun-2000, Publisher="Altium Limited"
C3 C6 C7 C8 C10 C11 C13 C14 C16 C17 C20 C21 C23 C26 C28 C32 C33 C46 C49 C50 C61 C65 C67: library part "Cap Pol1", "Polarized Capacitor (Radial)", LatestRevisionDate=17-Jul-2002, LatestRevisionNote="Re-released for DXP Platform.", PackageDescription="Polarized Capacitor (Radial); 2 Leads", PackageReference=RB7.6-15, Published=8-Jun-2000, Publisher="Altium Limited"
D1: library part LED2, "Typical RED, GREEN, YELLOW, AMBER GaAs LED", LatestRevisionDate=17-Jul-2002, LatestRevisionNote="Re-released for DXP Platform.", PackageDescription="SM LED; 2 Flat Leads", PackageReference=3.2X1.6X1.1, PackageVersion=Feb-2002, Published=8-Jun-2000, Publisher="Altium Limited"
D2 D3: library part Diode, "Default Diode", Code_JEDEC=DO-214-AB, LatestRevisionDate=17-Jul-2002, LatestRevisionNote="Re-released for DXP Platform.", PackageDescription="DO-214-AB/SMC; 2 C-Bend Leads; Body 7.9 x 5.9 mm, inc. leads (LxW)", PackageReference=SMC, PackageVersion=Sep-1996, Published=8-Jun-2000, Publisher="Altium Limited"
D4 D5 D6 D19 D29: library part "D Zener", "Zener Diode", LatestRevisionDate=17-Jul-2002, LatestRevisionNote="Re-released for DXP Platform.", PackageDescription="Diode, Thru-Hole; 2 Leads; 0.7 in Pin Spacing", PackageReference=DIODE-0.7, Published=8-Jun-2000, Publisher="Altium Limited"
D7 D8 D9 D10 D11 D12 D13 D14 D15 D16 D17 D18 D21 D22 D23 D24 D25 D26 D27 D28: library part "TVS DIODE"
D20: library part "D Schottky", "Schottky Diode", Code_JEDEC=DO-214-AA, LatestRevisionDate=17-Jul-2002, LatestRevisionNote="Re-released for DXP Platform.", PackageDescription="DO-214-AA/SMB; 2 C-Bend Leads; Body 5.3 x 3.6 mm, inc. leads (LxW)", PackageReference=SMB, Published=8-Jun-2000, Publisher="Altium Limited"
F1: "Fuse", LatestRevisionDate=17-Jul-2002, LatestRevisionNote="Re-released for DXP Platform.", PackageDescription="Thru-Hole; 2 Leads", PackageReference=PIN-W2/E2.8, Published=8-Jun-2000, Publisher="Altium Limited"
L1: library part Inductor
NTC1 R5: library part "Res Varistor", "Varistor (Voltage-Sensitive Resistor)", Code_IPC=RESC2012, LatestRevisionDate=29-May-2009, LatestRevisionNote="IPC-7351 Footprint Added.", PackageDescription="Chip Resistor 0805 Case Size", PackageReference=6-0805, PackageVersion=Mar-2003, Published=24-Mar-1999, Publisher="Altium Limited"
P1: "Header, 4-Pin", LatestRevisionDate=17-Jul-2002, LatestRevisionNote="Re-released for DXP Platform.", Publisher="Altium Limited"
P2: "Header, 3-Pin", LatestRevisionDate=17-Jul-2002, LatestRevisionNote="Re-released for DXP Platform.", Publisher="Altium Limited"
P3 P6: "Header, 8-Pin", LatestRevisionDate=17-Jul-2002, LatestRevisionNote="Re-released for DXP Platform.", Publisher="Altium Limited"
P4 P5 P7: "Header, 2-Pin", LatestRevisionDate=17-Jul-2002, LatestRevisionNote="Re-released for DXP Platform.", Publisher="Altium Limited"
Q1 Q4: library part NPN, "NPN Bipolar Transistor", Code_JEDEC=TO-226-AA, LatestRevisionDate=17-Jul-2002, LatestRevisionNote="Re-released for DXP Platform.", PackageDescription="TO, Flat Index; 3 In-Line, Axial Leads; Body Dia. 4.8mm; Leads 0.55 x 0.51 mm (max)", PackageReference=TO-226-AA, Published=8-Jun-2000, Publisher="Altium Limited"
Q2: library part PNP, "PNP Bipolar Transistor", LatestRevisionDate=29-May-2009, LatestRevisionNote="IPC-7351 Footprint Added.", PackageDescription="3-Pin SOT-23 Package 0.95 mm Pitch, 2.4 mm Lead Span", PackageReference=SOT-23B, PackageVersion=Aug-1999, Published=8-Jun-2000, Publisher="Altium Limited"
Q3: library part NMOS-2, "N-Channel Power MOSFET", ComponentLink1Description="Manufacturer Link", ComponentLink1URL=http://www.irf.com/, DatasheetVersion=PD-9.814, LatestRevisionDate=17-Jul-2002, LatestRevisionNote="Re-released for DXP Platform.", Note="Pin 2 is electrically connected to pin 4.", PackageDescription="TO, Thru-Hole, Vertical, Heatsink Mounted; 3 In-Line Leads; Pitch 2.54 mm", PackageReference=TO-220AB, PackageVersion=Feb-1997, Published=8-Jun-2000, Publisher="Altium Limited"
R1 R2 R3 R4 R6 R7 R8 R9 R10 R11 R12 R13 R14 R15 R16 R17 R18 R19 R20 R21 R22 R23 R24 R25 R26 R27 R28 R29 R30 R31 R32 R33 R34 R35 R36 R37 R38 R39 R40 R41 R42 R43 R44 R45 R46 R47 R48 R49 R50 R51 R52 R53 R54 R56 R57 R58 R59 R60 R62 R63 R64 R65 R66 R67 R68 R69 R70 R71 R72 R73: library part Res2, "Resistor", LatestRevisionDate=17-Jul-2002, LatestRevisionNote="Re-released for DXP Platform.", PackageDescription="Axial Device, Thru-Hole; 2 Leads; 0.4 in Pin Spacing", PackageReference=AXIAL-0.4, Published=8-Jun-2000, Publisher="Altium Limited"
R55 R61 R74: library part RPot, "Potentiometer", LatestRevisionDate=17-Jul-2002, LatestRevisionNote="Re-released for DXP Platform.", PackageDescription="Variable Resistor, Thru-Hole; 3 Leads", PackageReference=VR5, Published=8-Jun-2000, Publisher="Altium Limited", Set Position=0.5, Sim Note="Enter the Resistance value and the set point into parameter fields."
U3: library part LM1117IMP
U11: library part SNx5LBC184
U12: library part DAC7611
U16: "Low-Power JFET-Input Operational Amplifier, 7 to 36 V, 0 to 70 degC, 8-pin SOIC (D8), Green (RoHS & no Sb/Br)", Manufacturer="Texas Instruments", Rating=Catalog, Supplier Part Number 1=296-7175-5-ND, Total Supply Voltage(Max)(+5V is 5, +/-5V is 10)=36, Total Supply Voltage(Min)(+5V is 5, +/-5V is 10)=7, CMRR(Min)(dB)=80, Code_JEDEC=MS-012, ComponentLink1Description="Manufacturer URL", ComponentLink1URL=http://www.ti.com/, ComponentLink2Description=Datasheet, ComponentLink2URL=http://www.ti.com/lit/ds/symlink/tl062a.pdf, ComponentLink3Description="Package Specification", ComponentLink3URL=http://www.ti.com/litv/pdf/msoi002j, DatasheetVersion=SLOS078J, Eco-Plan="Green (RoHS & no Sb/Br)", GBW(Typ)(MHz)=1, IIB(Max)(pA)=200, Iq per channel(Max)(mA)=0.25, Mounting Technology="Surface Mount", Number of Channels=2, Offset Drift(Typ)(uV/C)=10, PackageDescription="8-Pin Plastic Small Outline, Body 4.9 x 3.9 mm, Pitch 1.27 mm", PackageReference=D8, PackageVersion="4040047-3/M, 06/2011", PartNumber=TL062ACD, Slew Rate(Typ)(V/us)=3.5, Sub Family="General Purpose Amplifier, High Supply Voltage Amplifier (>=30V), Low Power Amp (<=500uA)", Supplier 1=Digi-Key, Supplier 2=Farnell, Supplier 3=Newark, Supplier 4=Mouser, Supplier Part Number 2=9593241, Supplier Part Number 3=08F9224, Supplier Part Number 4=595-TL062ACD, Vio (25C)(Max)(mV)=6, Vn at 1kHz(Typ)(nV/rtHz)=42
Y1: "Crystal Oscillator", LatestRevisionDate=17-Jul-2002, LatestRevisionNote="Re-released for DXP Platform.", PackageDescription="Crystal, Thru-Hole; 2 Leads; Body 3.1 x 8.2 mm (Dia.xH)", PackageReference=R38, Published=8-Jun-2000, Publisher="Altium Limited"

## Via types
v1: diameter 19.68, hole 11.81, Top Layer to Bottom Layer, 9 vias
v2: diameter 11.81, hole 7.87, Top Layer to Bottom Layer, 5 vias

## Nets (pads, with @x,y where several pads share a name; then routed paths per layer and width w, separated by ;. In a path a pad name is that pad's centre, name@x,y a point inside that pad or via, vN(x,y) a via of type N, cw(c..) or ccw(c..) an arc to the next point about the centre after c; other vN are vias at no path point)
3.3VCC: C1.1 C3.1 C4.1 C9.1 C10.1 C14.1 C15.1 C26.1 C27.1 C65.1 C66.1 C67.1 C68.1 R1.1 R6.2 R11.1 R13.1 R53.1 U2.8 U3.3 U6.20 U8.8 U14.2 U14.26
5VDD: C16.1 C22.2 C23.1 C25.1 C28.1 C29.1 C30.1 C31.1 C32.1 C33.1 D4.2 R3.2 R10.2 R12.2 R20.1 R31.1 R32.1 R33.1 R34.1 U5.5 U7.8 U9.8 U10.8 U11.2 U11.3 U11.8
5VIN: C6.1 C7.1 C8.1 C11.1 C12.2 U1.5 U3.1 U4.1 U5.2
5VIN-: C1.2 C2.2 C3.2 C5.2 C6.2 C7.2 C8.2 C9.2 C10.2 C11.2 C12.1 C14.2 C15.2 C26.2 C27.2 C34.2 C36.2 C37.2 C39.2 C40.2 C42.2 C43.2 C45.2 C51.2 C54.2 C55.2 C57.2 C58.2 C62.1 C65.2 C66.2 C67.2 C68.2 C69.2 C71.2 C72.2 C74.2 C76.1 D7.1 D9.1 D10.1 D12.1 D13.1 D15.1 D16.1 D18.1 D21.1 D22.1 D24.1 D25.1 D26.1 P2.3 Q1.3 R2.1 R52.1 R58.1 R62.1 U1.7 U2.5 U3.2 U4.2 U5.1 U6.10 U7.3 U8.5 U9.2 U9.3 U10.2 U10.3 U14.3 U14.23
5VON: R11.2 U2.7 U6.8
15V: C17.1 C18.1 C49.1 C50.1 C59.2 C60.2 D20.2 R4.2 R35.1 R55.2 R68.1 R74.2 U4.6 U15.1 U16.8
-15V: C19.1 C20.2 C61.1 C63.2 R55.1 R74.1 U2.3 U4.4 U16.4
A1: R14.2 U6.15
A2: R15.2 U6.14
A3: R16.2 U6.13
A4: R17.2 U6.12
AIN0: C44.2 C45.1 D17.1 D18.2 R30.1 U14.4
AIN1: C43.1 C44.1 D16.2 D17.2 R29.1 U14.5
AIN2: C41.2 C42.1 D14.1 D15.2 R28.1 U14.6
AIN3: C40.1 C41.1 D13.2 D14.2 R27.1 U14.7
AIN4: C38.2 C39.1 D11.1 D12.2 R26.1 U14.8
AIN5: C37.1 C38.1 D10.2 D11.2 R25.1 U14.9
AIN6: C35.2 C36.1 D8.1 D9.2 R24.1 U14.10
AIN7: C34.1 C35.1 D7.2 D8.2 R23.1 U14.11
AIN8: D26.2 D27.2 R54.1 U14.14
AIN9: C55.1 C56.1 D22.2 D23.2 R48.1 U14.15 | length 604.3
  Top Layer w20: R48.1 C55.1 460,1630 ; C56.1 460,1630 ; D22.2@675.31,1665.31 640,1630 460,1630 ; D22.2 685,1671.06 774.25,1581.81 774.25,1555.75 D23.2
AIN10: C56.2 C57.1 D23.1 D24.2 R49.1 U14.16 | length 569.6
  Top Layer w20: R49.1 350,1574.09 424.57,1499.53 445.75,1499.53 C57.1@459.37,1485.91 ; C57.1 C57.1@459.37,1485.91 ; D24.2 D23.1 685,1553.94 658.94,1580 C56.2 527.01,1566.38 527.01,1553.54 C57.1@459.37,1485.91
AIN11: C58.1 D25.2 R50.1 U14.17 | length 448.3
  Top Layer w20: R50.1 350,1474.09 424.57,1399.53 445.75,1399.53 459.37,1385.91 C58.1 459.37,1325.63 485,1300 D25.2
AIN12: C69.1 C70.1 R64.1 U14.18
AIN13: C70.2 C71.1 R59.2 R60.1 U14.19
AIN14: C72.1 C73.1 R65.1 U14.20
AIN15: C73.2 C74.1 R66.1 U14.21
C\S\: U6.16 U14.32
D1: R31.2 U9.7 U12.2
D2: R33.2 U9.6 U12.3
D3: R32.2 U10.7 U12.4
D4: R34.2 U10.6 U12.5
DIN: U6.17 U14.29
DOUT: U6.18 U14.28
Iout: D19.2 P5.2 R40.1
IS: Q2.3 R42.2 U15.2
NetC2_1: C2.1 U6.4 Y1.2
NetC4_2: C4.2 R2.2 U6.1
NetC5_1: C5.1 U6.5 Y1.1
NetC13_1: C13.1 D3.2 L1.1 R8.1 R9.1
NetC48_1: C48.1 D20.1 Q3.3 R40.2
NetC51_1: C51.1 C52.2 R45.1 R54.2 | length 342.8
  Top Layer w20: R45.1 C51.1 ; R54.2 C51.1 ; C52.2 540,1985.91 472.99,2052.91 472.99,2066.38 C51.1
NetC62_2: C62.2 U14.1
NetC64_1: C64.1 R57.1 U16.3
NetC75_2: C75.2 R70.2 R71.2 U15.6
NetC76_2: C76.2 U14.24
NetD1_1: D1.1 R1.2
NetD1_2: D1.2 Q1.1
NetD2_1: D2.1 F1.2 R5.2
NetD2_2: D2.2 R8.2 R9.2
NetD4_1: D4.1 D6.2 P4.1 R18.2 R20.2 R22.2
NetD5_2: D5.2 D6.1 P4.2 R19.1 R21.2 R22.1
NetD29_2: D29.2 P7.1 Q4.3 R63.1
NetF1_1: F1.1 P1.4
NetNTC1_1: NTC1.1 R58.2 R66.2
NetP2_1: P2.1 R7.1 U6.3
NetP2_2: P2.2 R6.1 U6.2 U8.6
NetP3_1: P3.1 R23.2
NetP3_2: P3.2 R24.2
NetP3_3: P3.3 R25.2
NetP3_4: P3.4 R26.2
NetP3_5: P3.5 R27.2
NetP3_6: P3.6 R28.2
NetP3_7: P3.7 R29.2
NetP3_8: P3.8 R30.2
NetP6_1: P6.1 R52.2 | length 144.4
  Top Layer w20: P6.1 R52.2
NetP6_2: P6.2 R51.2 | length 144.4
  Top Layer w20: P6.2 R51.2
NetP6_3: P6.3 R50.2 | length 144.4
  Top Layer w20: P6.3 R50.2
NetP6_4: P6.4 R49.2 | length 144.4
  Top Layer w20: P6.4 R49.2
NetP6_5: P6.5 R48.2 | length 144.4
  Top Layer w20: P6.5 R48.2
NetP6_6: P6.6 R41.1 R47.2 | length 277.8
  Top Layer w20: P6.6 R47.2 269.37,1785.91 336.38,1852.91 336.38,1866.38 R41.1
NetP6_7: P6.7 R41.2 R45.2 R46.2 | length 344.4
  Top Layer w20: P6.7 R41.2 R46.2 R45.2
NetP6_8: P6.8 R53.2 | length 315.1
  Top Layer w20: P6.8 125,2130 175,2180 R53.2
NetQ2_2: Q2.2 Q3.2 R42.1
NetQ4_1: Q4.1 R68.2
NetQ4_2: Q4.2 R67.1
NetR3_1: R3.1 U2.1
NetR4_1: R4.1 U2.4
NetR7_2: R7.2 U7.2
NetR14_1: R14.1 U9.1
NetR15_1: R15.1 U9.4
NetR16_1: R16.1 U10.1
NetR17_1: R17.1 U10.4
NetR36_1: R36.1 R37.2 R38.1 U13.2
NetR55_3: R55.3 R56.2
NetR56_1: R56.1 R63.2 U16.2
NetR60_2: R60.2 R61.1 R62.2
NetR61_3: R61.3 R64.2
NetR67_2: R67.2 U16.1
NetR69_2: R69.2 U15.7
NetR71_1: R71.1 R72.2 R73.1
NetR73_2: R73.2 R74.3
PowerOK: Q1.2 U6.11
PSW: R51.1 U14.25
REFIN1+: C52.1 C53.1 D27.1 D28.2 R46.1 U14.12 | length 606.6
  Top Layer w20: R46.1 C52.1 459.37,1974.09 527.01,1906.46 527.01,1893.62 C53.1 585,1880 635,1930 D28.2 685,1970 710,1995 768.28,1995 780,2006.72 D27.1
REFIN1-: C53.2 C54.1 D21.2 D28.1 R47.1 U14.13 | length 616.8
  Top Layer w20: R47.1 C54.1 460,1830 ; C53.2 460,1830 ; D28.1 774.25,1924.25 774.25,1893.19 685,1803.94 D21.2 630,1800 600,1830 460,1830
REFOUT: NTC1.2 R59.1 R61.2 R65.2 U14.22
RS485+: R18.1 U11.6
RS485-: R19.2 U11.7
RxD: R12.1 U8.2 U11.1
SCLK: U6.19 U14.30
SGND: C16.2 C22.1 C23.2 C25.2 C28.2 C29.2 C30.2 C31.2 C32.2 C33.2 C46.2 C47.1 D5.1 R21.1 R39.1 U2.2 U5.4 U7.5 U8.3 U9.5 U10.5 U11.5
TxD: R10.1 U7.6 U11.4
VBIAS: R35.2 R37.1 R72.1 U13.1
VG: Q2.1 Q3.1 U15.3
VIN+: C21.1 C24.1 L1.2 U1.4
VIN-: C13.2 C21.2 C24.2 D3.1 P1.1 R5.1 U1.1
VOUT: R57.2 R70.1 U12.8
VREGF: C46.1 C47.2 R43.1 U12.1 U12.6 U15.5
VREGS: R43.2 R44.1 U15.4
±15VGND: C17.2 C18.2 C19.2 C20.1 C48.2 C49.2 C50.2 C59.1 C60.1 C61.2 C63.1 C64.2 C75.1 D19.1 D29.1 P5.1 P7.2 R36.2 R38.2 R39.2 R44.2 R69.1 U4.5 U12.7 U13.3 U15.9 U15.10
±15VON: R13.2 U2.6 U6.9
pads on no net: P1.2 P1.3 U1.6 U3.4 U5.8 U6.6 U6.7 U7.1 U7.4 U7.7 U8.1 U8.4 U8.7 U14.27 U14.31 U14.33 U15.8 U15.12 U16.5 U16.6 U16.7
copper on no net:
  other v1: 1055.63,2205.63 1095,2205.63 1134.37,2205.63 1055.63,2245 1095,2245 1134.37,2245 1055.63,2284.37 1095,2284.37 1134.37,2284.37
  other v2: 2480.94,2070 2525.94,2070 2503.62,2090 2480.94,2110 2525.94,2110

## Keep-outs
Keep-Out Layer:
  the board outline again, w11.81

## Silkscreen, mask and mechanical layers (free items; w line width, h text height)
Top Overlay:
  lines w4.72: 590.55,0 590.55,393.7 2559.06,393.7 2559.06,0
Mechanical 1:
  the board outline again, w11.81

## Text inside footprints (layer, text, board x,y; h text height)
C13: Top Overlay "+" at 2875,920.41 h27.56
C21: Top Overlay "+" at 2545,780.41 h27.56
D1: Top Overlay "+" at 980,3830 h60
U1: Top Overlay "VO-" at 2005,675 h27.56 r180; Top Overlay "VO+" at 2000,875 h27.56 r180; Top Overlay "VIN+" at 2390,925 h27.56 r180; Top Overlay "VIN-" at 2395,640 h27.56 r180